# EAGLE board l298driver (EAGLE 6.6.0)
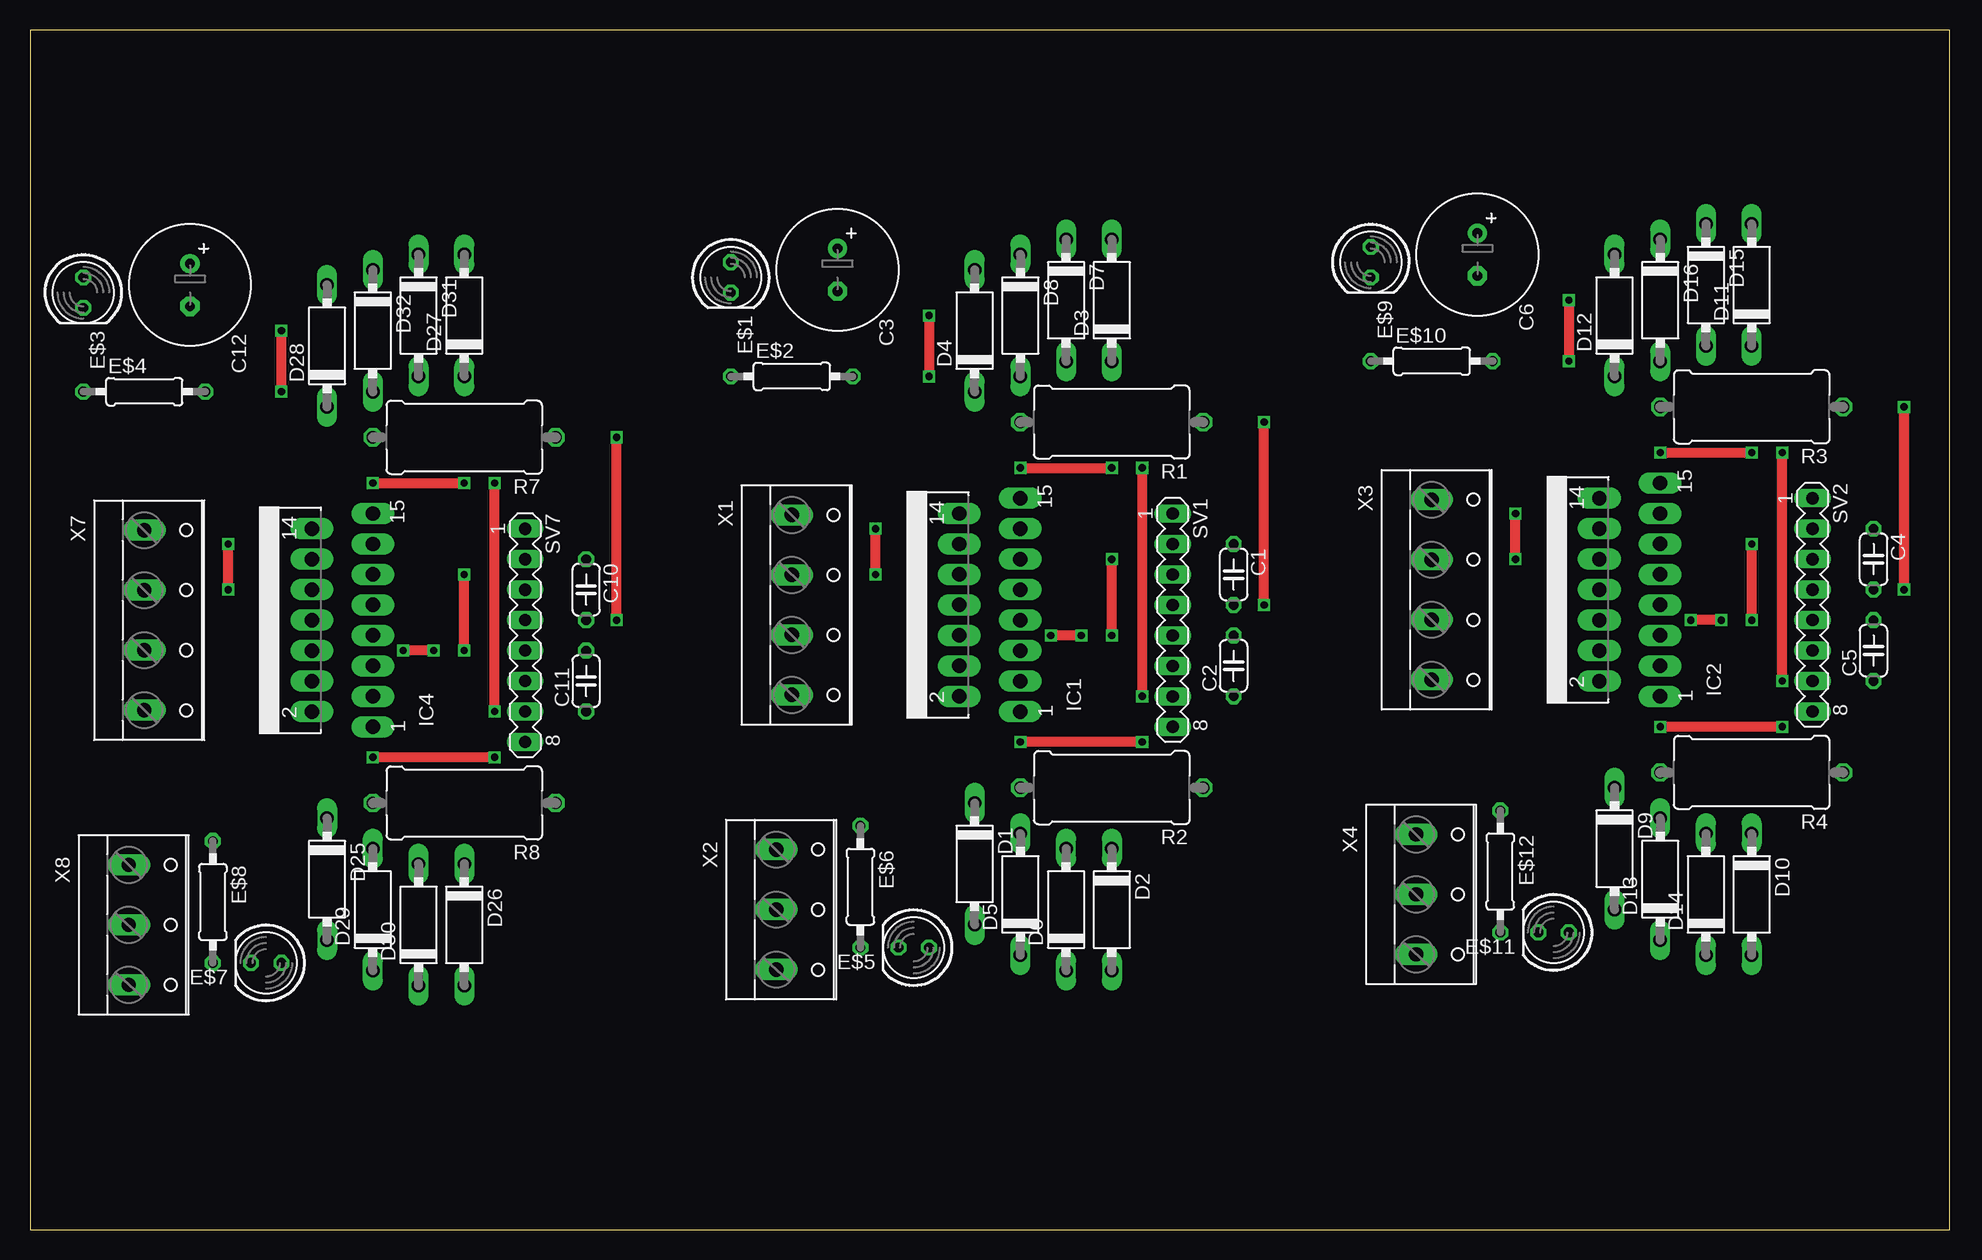
[diagram p0: board, top side]
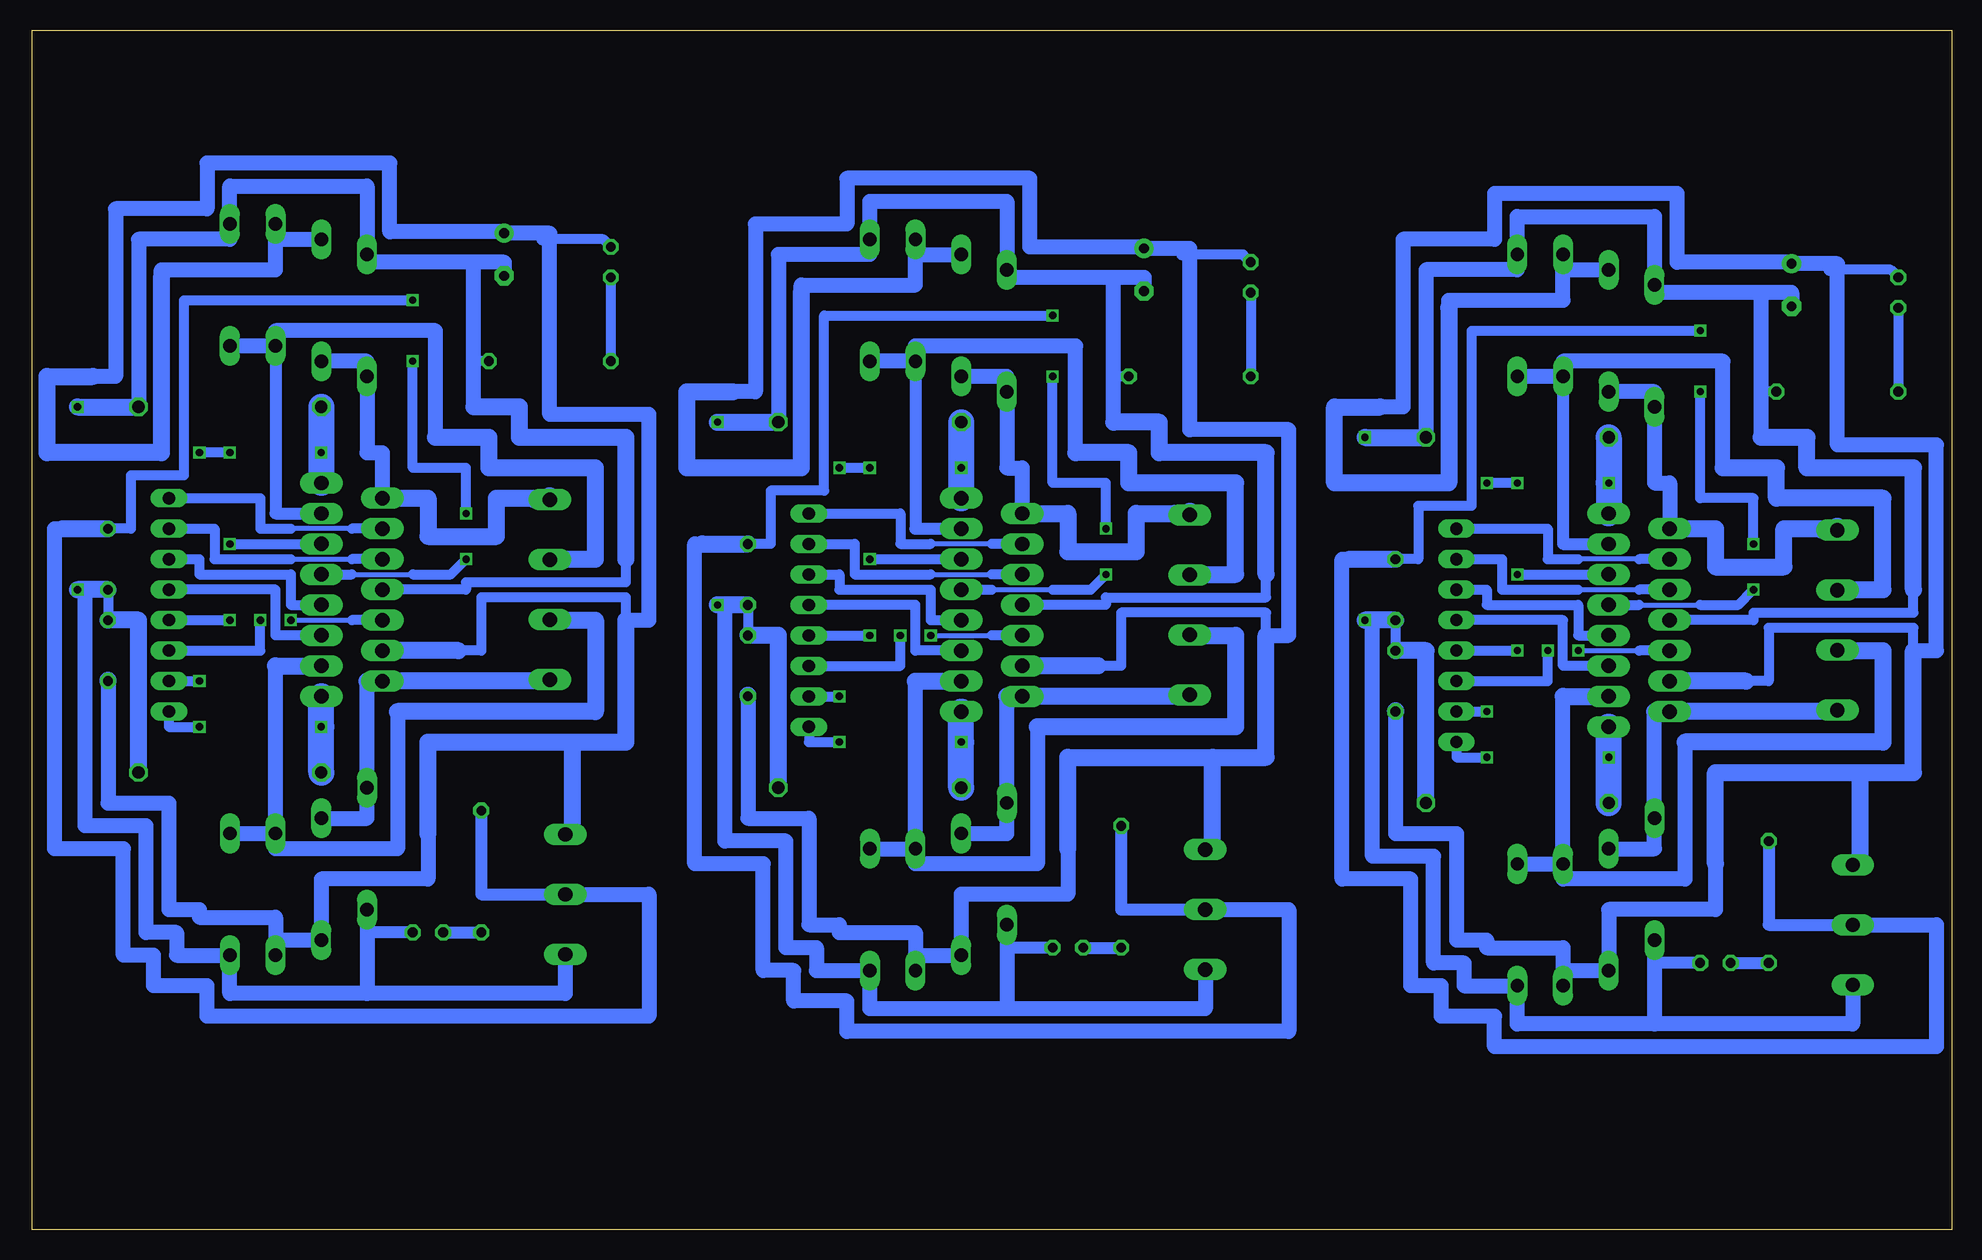
[diagram p1: board, bottom side, seen from below]

Size 160 x 100 mm. Coordinates in mm from the lower left corner, seen from the top.
Outline: 0,0 160,0 160,100 0,100 0,0
Copper layers (1*16): Top 0.035mm / dielectric 1.5mm / Bottom 0.035mm
Design rules "default": minimum track width 10mil, minimum drill 24mil, track to track 8mil, track to pad 8mil, pad to pad 8mil, via to via 8mil, smd to smd 8mil, copper to edge 40mil, drill to drill 8mil, minimum pad ring 10mil, minimum via ring 8mil, stop-mask expansion 4mil, vias tented up to drill 0mil, thermal gap 10mil

## Footprints (pad centres in the part's own frame; a part is rotated, then mirrored left to right if it is on the bottom)
C050-024X044 = drill 0.813 octagon: 1 -2.54,0; 2 2.54,0
E3,5-10 = drill 0.813 pad 1.6: + -1.778,0 | drill 0.813 pad 1.6 octagon: - 1.778,0
P1-10 = drill 1.118 long: A 5.08,0; C -5.08,0
LED5MM = drill 0.813 octagon: A -1.27,0; K 1.27,0
0207/10 = drill 0.813 octagon: 1 -5.08,0; 2 5.08,0
MULTIWATT-15 = drill 1.2 long: 1 -8.89,-7.62; 2 -7.62,-2.54; 3 -6.35,-7.62; 4 -5.08,-2.54; 5 -3.81,-7.62; 6 -2.54,-2.54; 7 -1.27,-7.62; 8 0,-2.54; 9 1.27,-7.62; 10 2.54,-2.54; 11 3.81,-7.62; 12 5.08,-2.54; 13 6.35,-7.62; 14 7.62,-2.54; 15 8.89,-7.62
RDH/15 = drill 1.016 octagon: 1 -7.62,0; 2 7.62,0
MA08-1 = drill 1.016 long: 1 -8.89,0; 2 -6.35,0; 3 -3.81,0; 4 -1.27,0; 5 1.27,0; 6 3.81,0; 7 6.35,0; 8 8.89,0
W237-4 = drill 1.194 long: 1 -7.5,-1.27; 2 -2.5,-1.27; 3 2.5,-1.27; 4 7.5,-1.27
W237-103 = drill 1.194 long: 1 -5,-1.29; 2 0,-1.29; 3 5,-1.29

## Placement (x,y rotation side)
C1  [C050-024X044]  100.33,54.61 270 top
C2  [C050-024X044]  100.33,46.99 90 top
C3  [E3,5-10]  67.31,80.01 270 top
C4  [C050-024X044]  153.67,55.88 270 top
C5  [C050-024X044]  153.67,48.26 90 top
C6  [E3,5-10]  120.65,81.28 270 top
C10  [C050-024X044]  46.35,53.34 270 top
C11  [C050-024X044]  46.35,45.72 90 top
C12  [E3,5-10]  13.34,78.74 270 top
D1  BA157  [P1-10]  78.74,30.48 270 top
D2  BA157  [P1-10]  90.17,26.67 270 top
D3  BA157  [P1-10]  90.17,77.47 90 top
D4  BA157  [P1-10]  78.74,74.93 90 top
D5  BA157  [P1-10]  82.55,27.94 90 top
D6  BA157  [P1-10]  86.36,26.67 90 top
D7  BA157  [P1-10]  86.36,77.47 270 top
D8  BA157  [P1-10]  82.55,76.2 270 top
D9  BA157  [P1-10]  132.08,31.75 270 top
D10  BA157  [P1-10]  143.51,27.94 270 top
D11  BA157  [P1-10]  143.51,78.74 90 top
D12  BA157  [P1-10]  132.08,76.2 90 top
D13  BA157  [P1-10]  135.89,29.21 90 top
D14  BA157  [P1-10]  139.7,27.94 90 top
D15  BA157  [P1-10]  139.7,78.74 270 top
D16  BA157  [P1-10]  135.89,77.47 270 top
D25  BA157  [P1-10]  24.77,29.21 270 top
D26  BA157  [P1-10]  36.2,25.4 270 top
D27  BA157  [P1-10]  36.2,76.2 90 top
D28  BA157  [P1-10]  24.77,73.66 90 top
D29  BA157  [P1-10]  28.57,26.67 90 top
D30  BA157  [P1-10]  32.38,25.4 90 top
D31  BA157  [P1-10]  32.38,76.2 270 top
D32  BA157  [P1-10]  28.57,74.93 270 top
E$1  [LED5MM]  58.42,79.38 270 top
E$2  [0207/10]  63.5,71.12 0 top
E$3  [LED5MM]  4.45,78.11 270 top
E$4  [0207/10]  9.53,69.85 0 top
E$5  [LED5MM]  73.66,23.5 180 top
E$6  [0207/10]  69.22,28.57 270 top
E$7  [LED5MM]  19.68,22.23 180 top
E$8  [0207/10]  15.24,27.3 270 top
E$9  [LED5MM]  111.76,80.64 270 top
E$10  [0207/10]  116.84,72.39 0 top
E$11  [LED5MM]  127,24.77 180 top
E$12  [0207/10]  122.56,29.84 270 top
IC1  L298  [MULTIWATT-15]  74.93,52.07 90 top
IC2  L298  [MULTIWATT-15]  128.27,53.34 90 top
IC4  L298  [MULTIWATT-15]  20.95,50.8 90 top
R1  [RDH/15]  90.17,67.31 180 top
R2  [RDH/15]  90.17,36.83 180 top
R3  [RDH/15]  143.51,68.58 180 top
R4  [RDH/15]  143.51,38.1 180 top
R7  [RDH/15]  36.2,66.04 180 top
R8  [RDH/15]  36.2,35.56 180 top
SV1  [MA08-1]  95.25,50.8 270 top
SV2  [MA08-1]  148.59,52.07 270 top
SV7  [MA08-1]  41.27,49.53 270 top
X1  [W237-4]  64.77,52.07 270 top
X2  [W237-103]  63.5,26.67 270 top
X3  [W237-4]  118.11,53.34 270 top
X4  [W237-103]  116.84,27.94 270 top
X7  [W237-4]  10.79,50.8 270 top
X8  [W237-103]  9.53,25.4 270 top

## Library data of the parts
C1-C6 C10-C12 E$2 E$4 E$6 E$8 E$10 E$12 R1-R4 R7 R8 = rcl
D1-D16 D25-D32 = diode
E$1 E$3 E$5 E$7 E$9 E$11 = led
IC1 IC2 IC4 = st-microelectronics; MPN: L298N; OC_FARNELL: 1589425; OC_NEWARK: 32M1527
SV1 SV2 SV7 = con-lstb; OC_FARNELL: unknown; OC_NEWARK: unknown
X1 X3 X7 = con-wago-500; OC_FARNELL: unknown; OC_NEWARK: unknown
X2 X4 X8 = con-wago-500; MPN: 237-103; OC_FARNELL: unknown; OC_NEWARK: 18M7116

## Nets
GND1: C1.2 C2.2 C3.- D1.A D2.A D3.A D4.A E$2.2 E$5.A IC1.8 R1.1 R2.1 X2.3
GND2: C4.2 C5.2 C6.- D9.A D10.A D11.A D12.A E$10.2 E$11.A IC2.8 R3.1 R4.1 X4.3
GND3: C10.2 C11.2 C12.- D25.A D26.A D27.A D28.A E$4.2 E$7.A IC4.8 R7.1 R8.1 X8.3
N$1: D1.C D5.A IC1.2 X1.4
N$2: D2.C D6.A IC1.3 X1.3
N$3: D3.C D7.A IC1.13 X1.2
N$4: D4.C D8.A IC1.14 X1.1
N$5: IC1.12 SV1.1
N$6: IC1.10 SV1.2
N$7: IC1.7 SV1.3
N$8: IC1.5 SV1.4
N$9: IC1.11 SV1.5
N$10: IC1.6 SV1.6
N$11: D9.C D13.A IC2.2 X3.4
N$12: D10.C D14.A IC2.3 X3.3
N$13: D11.C D15.A IC2.13 X3.2
N$14: D12.C D16.A IC2.14 X3.1
N$15: IC2.12 SV2.1
N$16: IC2.10 SV2.2
N$17: IC2.7 SV2.3
N$18: IC2.5 SV2.4
N$19: IC2.11 SV2.5
N$20: IC2.6 SV2.6
N$31: D25.C D29.A IC4.2 X7.4
N$32: D26.C D30.A IC4.3 X7.3
N$33: D27.C D31.A IC4.13 X7.2
N$34: D28.C D32.A IC4.14 X7.1
N$35: IC4.12 SV7.1
N$36: IC4.10 SV7.2
N$37: IC4.7 SV7.3
N$38: IC4.5 SV7.4
N$39: IC4.11 SV7.5
N$40: IC4.6 SV7.6
S$1: E$1.K E$2.1
S$2: E$3.K E$4.1
S$3: E$5.K E$6.2
S$4: E$7.K E$8.2
S$5: E$9.K E$10.1
S$6: E$11.K E$12.2
SENSE1: IC1.1 R2.2 SV1.8
SENSE2: IC1.15 R1.2 SV1.7
SENSE3: IC2.1 R4.2 SV2.8
SENSE4: IC2.15 R3.2 SV2.7
SENSE7: IC4.1 R8.2 SV7.8
SENSE8: IC4.15 R7.2 SV7.7
VCC1: C1.1 E$6.1 IC1.9 X2.2
VCC2: C4.1 E$12.1 IC2.9 X4.2
VCC3: C10.1 E$8.1 IC4.9 X8.2
VDD1: C2.1 C3.+ D5.C D6.C D7.C D8.C E$1.A IC1.4 X2.1
VDD2: C5.1 C6.+ D13.C D14.C D15.C D16.C E$9.A IC2.4 X4.1
VDD3: C11.1 C12.+ D29.C D30.C D31.C D32.C E$3.A IC4.4 X8.1

## Tracks (layer width: path | path; a pad name or v marks a point on that pad's centre or on a via)
GND1  (via drill 0.6)
  Top 0.813: v102.87,52.07 v102.87,67.31
  Bottom 0.813: C1.2 C2.2 | 57.15,54.61 57.15,52.7 70.48,52.7 70.48,52.07 IC1.8 | E$2.2 69.85,71.12
  Bottom 1.016: E$5.A 78.74,23.5 78.74,24.13
  Bottom 1.27: v102.87,52.07 102.23,52.07 102.23,32.38 97.16,32.38 97.16,23.5 94.61,23.5 94.61,21.59 D2.A 90.17,18.41 78.74,18.41 | X2.3 62.21,18.41 78.74,18.41 | D1.A 78.74,24.13 78.74,18.41 | R1.1 97.79,81.28 90.17,81.28 D3.A 90.17,85.72 78.74,85.72 D4.A 78.74,79.38 69.85,79.38 | 69.85,79.38 67.31,79.38 C3.- | 69.85,67.31 69.85,71.12 69.85,79.38
  Bottom 1.422: 57.15,54.61 57.15,64.77 66.04,64.77 66.04,67.31 69.85,67.31 | R2.1 97.79,49.53 C2.2 | C1.2 v102.87,52.07 | v102.87,67.31 R1.1
GND2  (via drill 0.6)
  Top 0.813: v156.21,53.34 v156.21,68.58
  Bottom 0.813: C4.2 C5.2 | 110.49,55.88 110.49,53.98 123.83,53.98 123.83,53.34 IC2.8 | E$10.2 123.19,72.39
  Bottom 1.016: E$11.A 132.08,24.77 132.08,25.4
  Bottom 1.27: v156.21,53.34 155.57,53.34 155.57,33.66 150.5,33.66 150.5,24.77 147.96,24.77 147.96,22.86 D10.A 143.51,19.68 132.08,19.68 | X4.3 115.55,19.68 132.08,19.68 | D9.A 132.08,25.4 132.08,19.68 | R3.1 151.13,82.55 143.51,82.55 D11.A 143.51,87 132.08,87 D12.A 132.08,80.64 123.19,80.64 | 123.19,80.64 120.65,80.64 C6.- | 123.19,68.58 123.19,72.39 123.19,80.64
  Bottom 1.422: 110.49,55.88 110.49,66.04 119.38,66.04 119.38,68.58 123.19,68.58 | R4.1 151.13,50.8 C5.2 | C4.2 v156.21,53.34 | v156.21,68.58 R3.1
GND3  (via drill 0.6)
  Top 0.813: v48.9,50.8 v48.9,66.04
  Bottom 0.813: C10.2 C11.2 | 3.17,53.34 3.17,51.44 16.51,51.44 16.51,50.8 IC4.8 | E$4.2 15.88,69.85
  Bottom 1.016: E$7.A 24.77,22.23 24.77,22.86
  Bottom 1.27: v48.9,50.8 48.26,50.8 48.26,31.11 43.18,31.11 43.18,22.23 40.64,22.23 40.64,20.32 D26.A 36.2,17.14 24.77,17.14 | X8.3 8.23,17.14 24.77,17.14 | D25.A 24.77,22.86 24.77,17.14 | R7.1 43.81,80.01 36.2,80.01 D27.A 36.2,84.45 24.77,84.45 D28.A 24.77,78.11 15.88,78.11 | 15.88,78.11 13.34,78.11 C12.- | 15.88,66.04 15.88,69.85 15.88,78.11
  Bottom 1.422: 3.17,53.34 3.17,63.5 12.06,63.5 12.06,66.04 15.88,66.04 | R8.1 43.81,48.26 C11.2 | C10.2 v48.9,50.8 | v48.9,66.04 R7.1
N$1
  Bottom 1.27: D5.A 78.74,33.02 D1.C 78.74,44.45
  Bottom 1.422: X1.4 63.5,44.45 IC1.2 78.74,44.45
N$2
  Bottom 1.27: D6.A 86.36,45.72 | D2.C D6.A | 76.2,41.91 76.2,30.48 86.36,30.48 D6.A
  Bottom 1.422: 86.36,45.72 IC1.3 | X1.3 63.5,49.53 59.69,49.53 59.69,41.91 76.2,41.91
N$3
  Bottom 1.016: D7.A 86.36,58.42 IC1.13
  Bottom 1.27: D3.C D7.A 86.36,73.66 73.03,73.66 73.03,64.77
  Bottom 1.422: X1.2 63.5,54.61 59.69,54.61 59.69,62.23 68.58,62.23 68.58,64.77 73.03,64.77
N$4
  Bottom 1.27: IC1.14 77.47,63.5 78.74,63.5 D4.C 78.74,71.12 D8.A
  Bottom 1.422: IC1.14 73.66,59.69 73.66,56.52 67.94,56.52 67.94,59.69 64.77,59.69 64.77,59.57 X1.1
  Bottom 1.778: X1.1 63.5,59.69
N$5
  Bottom 0.406: 80.01,57.15 85.09,57.15
  Bottom 0.813: SV1.1 87.63,59.69 87.63,57.15 85.09,57.15 | IC1.12 80.01,57.15
N$6
  Bottom 0.406: 85.09,54.61 80.01,54.61
  Bottom 0.813: IC1.10 80.01,54.61 | SV1.2 91.44,57.15 91.44,54.61 85.09,54.61
N$7
  Bottom 0.813: SV1.3 92.71,54.61 92.71,53.34 85.09,53.34 85.09,50.8 IC1.7
N$8
  Bottom 0.813: IC1.5 86.36,48.26 86.36,52.07 SV1.4
N$9  (via drill 0.6)
  Top 0.813: v90.17,49.53 v90.17,55.88
  Bottom 0.813: SV1.5 v90.17,49.53 | v90.17,55.88 IC1.11
N$10  (via drill 0.6)
  Top 0.813: v87.63,49.53 v85.09,49.53
  Bottom 0.406: v85.09,49.53 80.01,49.53
  Bottom 0.813: IC1.6 80.01,49.53 | SV1.6 87.63,46.99 v87.63,49.53
N$11
  Bottom 1.27: D13.A 132.08,34.29 D9.C 132.08,45.72
  Bottom 1.422: X3.4 116.84,45.72 IC2.2 132.08,45.72
N$12
  Bottom 1.27: D14.A 139.7,46.99 | D10.C D14.A | 129.54,43.18 129.54,31.75 139.7,31.75 D14.A
  Bottom 1.422: 139.7,46.99 IC2.3 | X3.3 116.84,50.8 113.03,50.8 113.03,43.18 129.54,43.18
N$13
  Bottom 1.016: D15.A 139.7,59.69 IC2.13
  Bottom 1.27: D11.C D15.A 139.7,74.93 126.36,74.93 126.36,66.04
  Bottom 1.422: X3.2 116.84,55.88 113.03,55.88 113.03,63.5 121.92,63.5 121.92,66.04 126.36,66.04
N$14
  Bottom 1.27: IC2.14 130.81,64.77 132.08,64.77 D12.C 132.08,72.39 D16.A
  Bottom 1.422: IC2.14 127,60.96 127,57.78 121.28,57.78 121.28,60.96 118.11,60.96 118.11,60.84 X3.1
  Bottom 1.778: X3.1 116.84,60.96
N$15
  Bottom 0.406: 133.35,58.42 138.43,58.42
  Bottom 0.813: SV2.1 140.97,60.96 140.97,58.42 138.43,58.42 | IC2.12 133.35,58.42
N$16
  Bottom 0.406: 138.43,55.88 133.35,55.88
  Bottom 0.813: IC2.10 133.35,55.88 | SV2.2 144.78,58.42 144.78,55.88 138.43,55.88
N$17
  Bottom 0.813: SV2.3 146.05,55.88 146.05,54.61 138.43,54.61 138.43,52.07 IC2.7
N$18
  Bottom 0.813: IC2.5 139.7,49.53 139.7,53.34 SV2.4
N$19  (via drill 0.6)
  Top 0.813: v143.51,50.8 v143.51,57.15
  Bottom 0.813: SV2.5 v143.51,50.8 | v143.51,57.15 IC2.11
N$20  (via drill 0.6)
  Top 0.813: v140.97,50.8 v138.43,50.8
  Bottom 0.406: v138.43,50.8 133.35,50.8
  Bottom 0.813: IC2.6 133.35,50.8 | SV2.6 140.97,48.26 v140.97,50.8
N$31
  Bottom 1.27: D29.A 24.77,31.75 D25.C 24.77,43.18
  Bottom 1.422: X7.4 9.53,43.18 IC4.2 24.77,43.18
N$32
  Bottom 1.27: D30.A 32.38,44.45 | D26.C D30.A | 22.23,40.64 22.23,29.21 32.38,29.21 D30.A
  Bottom 1.422: 32.38,44.45 IC4.3 | X7.3 9.53,48.26 5.71,48.26 5.71,40.64 22.23,40.64
N$33
  Bottom 1.016: D31.A 32.38,57.15 IC4.13
  Bottom 1.27: D27.C D31.A 32.38,72.39 19.05,72.39 19.05,63.5
  Bottom 1.422: X7.2 9.53,53.34 5.71,53.34 5.71,60.96 14.61,60.96 14.61,63.5 19.05,63.5
N$34
  Bottom 1.27: IC4.14 23.5,62.23 24.77,62.23 D28.C 24.77,69.85 D32.A
  Bottom 1.422: IC4.14 19.68,58.42 19.68,55.24 13.97,55.24 13.97,58.42 10.79,58.42 10.79,58.3 X7.1
  Bottom 1.778: X7.1 9.53,58.42
N$35
  Bottom 0.406: 26.04,55.88 31.11,55.88
  Bottom 0.813: SV7.1 33.66,58.42 33.66,55.88 31.11,55.88 | IC4.12 26.04,55.88
N$36
  Bottom 0.406: 31.11,53.34 26.04,53.34
  Bottom 0.813: IC4.10 26.04,53.34 | SV7.2 37.47,55.88 37.47,53.34 31.11,53.34
N$37
  Bottom 0.813: SV7.3 38.73,53.34 38.73,52.07 31.11,52.07 31.11,49.53 IC4.7
N$38
  Bottom 0.813: IC4.5 32.38,46.99 32.38,50.8 SV7.4
N$39  (via drill 0.6)
  Top 0.813: v36.2,48.26 v36.2,54.61
  Bottom 0.813: SV7.5 v36.2,48.26 | v36.2,54.61 IC4.11
N$40  (via drill 0.6)
  Top 0.813: v33.66,48.26 v31.11,48.26
  Bottom 0.406: v31.11,48.26 26.04,48.26
  Bottom 0.813: IC4.6 26.04,48.26 | SV7.6 33.66,45.72 v33.66,48.26
S$1
  Bottom 0.813: E$1.K E$2.1
S$2
  Bottom 0.813: E$3.K E$4.1
S$3
  Bottom 1.016: E$5.K E$6.2
S$4
  Bottom 1.016: E$7.K E$8.2
S$5
  Bottom 0.813: E$9.K E$10.1
S$6
  Bottom 1.016: E$11.K E$12.2
SENSE1  (via drill 0.6)
  Top 0.813: v92.71,40.64 v82.55,40.64
  Bottom 0.813: SV1.8 95.25,40.64 v92.71,40.64
  Bottom 2.184: R2.2 v82.55,40.64 IC1.1
SENSE2  (via drill 0.6)
  Top 0.813: v82.55,63.5 v90.17,63.5 | v92.71,44.45 v92.71,63.5
  Bottom 0.813: v90.17,63.5 v92.71,63.5 | SV1.7 v92.71,44.45
  Bottom 2.184: R1.2 v82.55,63.5 IC1.15
SENSE3  (via drill 0.6)
  Top 0.813: v146.05,41.91 v135.89,41.91
  Bottom 0.813: SV2.8 148.59,41.91 v146.05,41.91
  Bottom 2.184: R4.2 v135.89,41.91 IC2.1
SENSE4  (via drill 0.6)
  Top 0.813: v135.89,64.77 v143.51,64.77 | v146.05,45.72 v146.05,64.77
  Bottom 0.813: v143.51,64.77 v146.05,64.77 | SV2.7 v146.05,45.72
  Bottom 2.184: R3.2 v135.89,64.77 IC2.15
SENSE7  (via drill 0.6)
  Top 0.813: v38.73,39.37 v28.57,39.37
  Bottom 0.813: SV7.8 41.27,39.37 v38.73,39.37
  Bottom 2.184: R8.2 v28.57,39.37 IC4.1
SENSE8  (via drill 0.6)
  Top 0.813: v28.57,62.23 v36.2,62.23 | v38.73,43.18 v38.73,62.23
  Bottom 0.813: v36.2,62.23 v38.73,62.23 | SV7.7 v38.73,43.18
  Bottom 2.184: R7.2 v28.57,62.23 IC4.15
VCC1  (via drill 0.6)
  Top 0.813: v70.48,54.61 v70.48,58.42 | v74.93,76.2 v74.93,71.12
  Bottom 0.406: 80.01,53.34 74.93,53.34
  Bottom 0.813: IC1.9 80.01,53.34 | 74.93,53.34 71.75,53.34 v70.48,54.61 | C1.1 98.42,57.15 98.42,61.59 93.98,61.59 93.98,76.2 v74.93,76.2 | v70.48,58.42 70.48,62.23 74.93,62.23 v74.93,71.12
  Bottom 1.016: E$6.1 69.22,26.67 X2.2
  Bottom 1.27: 104.14,57.15 104.78,57.15 104.78,30.48 99.06,30.48 99.06,21.59 96.52,21.59 96.52,19.05 92.08,19.05 92.08,16.51 55.24,16.51 55.24,26.67 X2.2 62.23,26.67
  Bottom 1.422: 104.14,57.15 C1.1
VCC2  (via drill 0.6)
  Top 0.813: v123.83,55.88 v123.83,59.69 | v128.27,77.47 v128.27,72.39
  Bottom 0.406: 133.35,54.61 128.27,54.61
  Bottom 0.813: IC2.9 133.35,54.61 | 128.27,54.61 125.09,54.61 v123.83,55.88 | C4.1 151.76,58.42 151.76,62.87 147.32,62.87 147.32,77.47 v128.27,77.47 | v123.83,59.69 123.83,63.5 128.27,63.5 v128.27,72.39
  Bottom 1.016: E$12.1 122.56,27.94 X4.2
  Bottom 1.27: 157.48,58.42 158.12,58.42 158.12,31.75 152.4,31.75 152.4,22.86 149.86,22.86 149.86,20.32 145.41,20.32 145.41,17.78 108.58,17.78 108.58,27.94 X4.2 115.57,27.94
  Bottom 1.422: 157.48,58.42 C4.1
VCC3  (via drill 0.6)
  Top 0.813: v16.51,53.34 v16.51,57.15 | v20.95,74.93 v20.95,69.85
  Bottom 0.406: 26.04,52.07 20.95,52.07
  Bottom 0.813: IC4.9 26.04,52.07 | 20.95,52.07 17.78,52.07 v16.51,53.34 | C10.1 44.45,55.88 44.45,60.33 40.01,60.33 40.01,74.93 v20.95,74.93 | v16.51,57.15 16.51,60.96 20.95,60.96 v20.95,69.85
  Bottom 1.016: E$8.1 15.24,25.4 X8.2
  Bottom 1.27: 50.16,55.88 50.8,55.88 50.8,29.21 45.09,29.21 45.09,20.32 42.55,20.32 42.55,17.78 38.1,17.78 38.1,15.24 1.27,15.24 1.27,25.4 X8.2 8.26,25.4
  Bottom 1.422: 50.16,55.88 C10.1
VDD1
  Bottom 0.813: 71.12,46.99 69.22,46.99 69.22,51.44 57.15,51.44 57.15,49.53 | E$1.A 59.05,81.28 64.14,81.28
  Bottom 1.016: 63.5,81.79 64.14,81.79 64.14,81.28
  Bottom 1.27: C2.1 100.33,34.29 95.25,34.29 95.25,25.4 92.71,25.4 92.71,24.77 86.36,24.77 D6.C 86.36,22.86 D5.C 82.55,27.94 73.66,27.94 73.66,31.75 | D8.C 86.36,81.28 D7.C 86.36,78.74 95.89,78.74 95.89,78.11 | 57.15,49.53 55.24,49.53 55.24,66.67 63.5,66.67 63.5,81.79 C3.+ 67.31,81.92 76.83,81.92 76.83,87.63 92.08,87.63 92.08,83.82 99.69,83.82 99.69,69.85 101.6,69.85
  Bottom 1.422: C2.1 100.33,44.53 | 73.66,31.75 73.66,39.37 61.59,39.37 | 61.59,39.37 57.15,39.37 57.15,49.53 | 71.12,46.99 IC1.4 | 95.89,78.11 95.89,63.5 105.41,63.5 105.41,69.85 101.6,69.85 | X2.1 61.59,31.67 61.59,39.37
VDD2
  Bottom 0.813: 124.46,48.26 122.56,48.26 122.56,52.7 110.49,52.7 110.49,50.8 | E$9.A 112.39,82.55 117.47,82.55
  Bottom 1.016: 116.84,83.06 117.47,83.06 117.47,82.55
  Bottom 1.27: C5.1 153.67,35.56 148.59,35.56 148.59,26.67 146.05,26.67 146.05,26.04 139.7,26.04 D14.C 139.7,24.13 D13.C 135.89,29.21 127,29.21 127,33.02 | D16.C 139.7,82.55 D15.C 139.7,80.01 149.22,80.01 149.22,79.38 | 110.49,50.8 108.58,50.8 108.58,67.94 116.84,67.94 116.84,83.06 C6.+ 120.65,83.19 130.18,83.19 130.18,88.9 145.41,88.9 145.41,85.09 153.03,85.09 153.03,71.12 154.94,71.12
  Bottom 1.422: C5.1 153.67,45.8 | 127,33.02 127,40.64 114.94,40.64 | 114.94,40.64 110.49,40.64 110.49,50.8 | 124.46,48.26 IC2.4 | 149.22,79.38 149.22,64.77 158.75,64.77 158.75,71.12 154.94,71.12 | X4.1 114.94,32.94 114.94,40.64
VDD3
  Bottom 0.813: 17.14,45.72 15.24,45.72 15.24,50.16 3.17,50.16 3.17,48.26 | E$3.A 5.08,80.01 10.16,80.01
  Bottom 1.016: 9.53,80.52 10.16,80.52 10.16,80.01
  Bottom 1.27: C11.1 46.35,33.02 41.27,33.02 41.27,24.13 38.73,24.13 38.73,23.5 32.38,23.5 D30.C 32.38,21.59 D29.C 28.57,26.67 19.68,26.67 19.68,30.48 | D32.C 32.38,80.01 D31.C 32.38,77.47 41.91,77.47 41.91,76.83 | 3.17,48.26 1.27,48.26 1.27,65.41 9.53,65.41 9.53,80.52 C12.+ 13.34,80.64 22.86,80.64 22.86,86.36 38.1,86.36 38.1,82.55 45.72,82.55 45.72,68.58 47.62,68.58
  Bottom 1.422: C11.1 46.35,43.26 | 19.68,30.48 19.68,38.1 7.62,38.1 | 7.62,38.1 3.17,38.1 3.17,48.26 | 17.14,45.72 IC4.4 | 41.91,76.83 41.91,62.23 51.44,62.23 51.44,68.58 47.62,68.58 | X8.1 7.62,30.4 7.62,38.1